# Altium PCB 7797-20-0225.PcbDoc
Units mil, origin at the board's own origin, x right, y up, seen from the top; angles counter-clockwise.
Board outline 235 x 230 mil, 2 copper layers (Top Layer, Bottom Layer), stack 12.8 mil thick; 6 components, 6 nets, 22 pads, 7 vias.
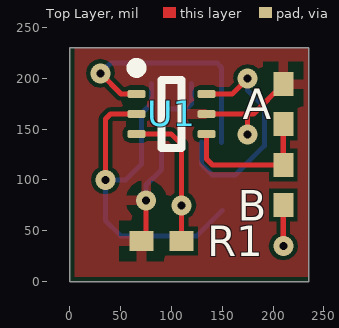
[diagram p0: Top Layer view]
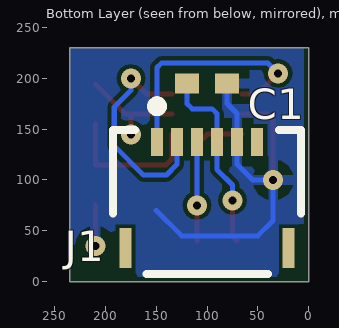
[diagram p1: Bottom Layer view, seen from below]

## Layer stack, top to bottom
Top Solder: solder mask 0.4, Solder Resist, Dk 3.5
Top Layer: signal copper 1.4
Dielectric 2: core 10, Dk 4.2
Bottom Layer: signal copper 1.4
Bottom Solder: solder mask 0.4, Solder Resist, Dk 3.5

## Board outline
0,0 0,230 235,230 235,0

## Design rules (kind name [scope] priority, off if disabled: settings)
AcuteAngle [All] p1: minimum=6.00000000000000E+0001 checktracksonly=FALSE
Clearance [All] p1: gap=4 ignorepadtopadclearanceinfootprint=FALSE except(0: Arc-Hole Track-Hole SMDPad-Hole THPad-Hole Via-Hole Fill-Hole Poly-Hole Region-Hole Text-Hole)
MinimumAnnularRing [All] p1: minimumring=10
PolygonConnect [All] p1: connectstyle=Relief reliefconductorwidth=10 reliefentries=4 polygonreliefangle="90 Angle" airgapwidth=10
RoutingVias [All] p1: holewidth=28 width=50 viastyle="Through Hole" minholewidth=28 minwidth=50 maxholewidth=28 maxwidth=50 useviatemplates=TRUE viatemplateguid#1={3E3A0D4B-A0A5-4DA1-8870-E81B4EFEB651} viatemplatename#1=v50h20
SolderMaskExpansion [All] p1: expansion=4
Width [All] p1: maxlimit=10 minlimit=5 preferedwidth=6
30 further rules are at their usual default settings.

## Components (designator, comment, footprint, x,y, rotation, side; value= is the part's Value field where it differs from the comment)
A "CRCW040210K0FKED" 0402 210,174.69 r90 top
B "CRCW040210K0FKED" 0402 210,95 r270 top
C1 "GRM155R71C103KA01D" 0402 100,195 r0 bottom
J1 "503480-0600" MOLX-503480-0600 100,85 r180 bottom
R1 "CRCW040210K0FKED" 0402 90.16,40 r0 top
U1 "TMP102AIDRLT" DRL0006A_L 100,165 r0 top

## Footprints (in the part's own frame and the unit in brackets; to place one, negate y for a bottom-side part, rotate by r counter-clockwise, add the part's x,y. Pads: shape width x height; smd on the part's side, far side on the other; paste and mask are expansions set on the pad)
0402 [mm] "Chip Capacitor, Body 1.0x0.5mm, IPC High Density"
  rect 0.6x0.5 smd: 1(-0.5,0) 2(0.5,0)
  body extent -0.55,-0.3 0.55,0.3, height 1.3
DRL0006A_L [mm] "SOT23, 6-Leads, Body 1.7x1.3mm, Pitch 0.5mm, IPC High Density"
  rrect50% 0.45x0.2 smd: 1(-0.875,0.5) 2(-0.875,0) 3(-0.875,-0.5) 4(0.875,-0.5) 5(0.875,0) 6(0.875,0.5)
  silkscreen extent -1,-0.85 0.25,1.27, body extent -0.65,-0.85 0.65,0.85, height 0.6
MOLX-503480-0600 [mm] "FPC Connector, 6-Leads, Right Angle, Pitch 0.5 mm, Mated Height 1.0 mm, SMT"
  rect 0.3x0.7 smd: 1(-1.25,1.325) 2(-0.75,1.325) 3(-0.25,1.325) 4(0.25,1.325) 5(0.75,1.325) 6(1.25,1.325)
  rect 0.3x1 smd: MP1(-2.04,-1.325) MP2(2.04,-1.325)
  silkscreen extent -2.35,-1.97 2.35,2.35, body extent -2.35,-1.98 2.35,1.62, height 1.91

## Part data
A B R1: library part CRCW0402xxxxFKED, "0.125W, -55-155C, 1005, 50V, ±1%"
C1: library part Cap, "Cap, 0.01 µF, 16 V, X7R"
J1: library part CMP-1241-00113-1, "0.5 mm Pitch Easy-On(TM) BackFlip(TM) Type FPC Connector, 1.0 mm Mated Height, Right Angle, SMT, Dual Contact, 6 Circuits, -40 to 85 degC, ELV and RoHS Compliant, Tape and Reel"
U1: library part CMP-1685-00013-1, "Low Power Digital Temperature Sensor with SMBus and Two-Wire Serial Interface, 1.4 to 3.6 V, -40 to 125 degC, 6-Pin SOT (DRL), Green (RoHS & no Sb/Br), Tape and Reel"

## Via types
v1: diameter 19.68, hole 7.87, Top Layer to Bottom Layer, 4 vias
v2: diameter 19.68, hole 7.87, Top Layer to Bottom Layer, tented both sides, 3 vias

## Nets (pads, with @x,y where several pads share a name; then routed paths per layer and width w, separated by ;. In a path a pad name is that pad's centre, name@x,y a point inside that pad or via, vN(x,y) a via of type N, cw(c..) or ccw(c..) an arc to the next point about the centre after c; other vN are vias at no path point)
I2C1_SCL: J1.1 U1.1 | length 242.7
  Top Layer w5: v1(30,205) 50.32,184.69 U1.1
  Bottom Layer w5: v1(30,205) 40,215 145,215 149.21,210.79 J1.1
I2C1_SDA: J1.2 U1.6 | length 219.7
  Top Layer w5: U1.6 159.69,184.69 v1(175,200)
  Bottom Layer w5: J1.2 129.53,115.47 140,105 162.69,105 191.34,133.66 191.34,171.77 175,188.11 v1(175,200)
s3V3: A.2 C1.2 J1.4 R1.1 U1.5 | length 294.6
  Top Layer w5: R1.1 75,44.53 v2(75,80) ; U1.5 175,165 ; v1(175,145) 175,165 ; A.2 180.63,165 175,165
  Bottom Layer w5: v2(75,80) 75,95 90.16,110.16 J1.4 90.16,165.16 95,170 114.69,170 119.69,175 C1.2
sGND: B.2 C1.1 J1.5 U1.2 | length 430
  Top Layer w5: v2(35,100) 35,160 40,165 U1.2 ; v1(210,35) B.2
  Bottom Layer w5: C1.1 80.32,175.32 70.47,165.47 J1.5 70.47,115.47 55,100 v2(35,100) 35,60 50,45 125,45 150,70
sTEMP_ADD0: A.1 B.1 U1.4 | length 143.1
  Top Layer w5: U1.4 134.45,120.55 140.32,114.69 B.1 A.1
sTEMP_ALERT: J1.3 R1.2 U1.3 | length 205.9
  Top Layer w5: U1.3 99.69,145.31 109.84,135.16 R1.2
  Bottom Layer w5: J1.3 110,137.01 v2(110,75)
pads on no net: J1.6 J1.MP1 J1.MP2

## Polygon pours and split planes (outlines as drawn)
sGND on Bottom Layer "GND flood-Bottom" (solid, remove dead copper, pour order 0): 5,230 235,230 235,5 5,5
s3V3 on Top Layer "GND flood-Bottom" (solid, remove dead copper, pour order 2): 5,230 235,230 235,5 5,5

## Silkscreen, mask and mechanical layers (free items; w line width, h text height)
Mechanical 1:
  lines w10: 5,5 5,225 230,225 230,5 5,5